# EAGLE board tp001 (EAGLE 7.6.0)

Size 56.82 x 53.33 mm. Coordinates in mm from the lower left corner, seen from the top.
Outline: 0,0 56.82,0 56.82,53.33 0,53.33 0,0
Copper layers (1*16): Top 0.035mm / dielectric 1.5mm / Bottom 0.035mm
Design rules "default": minimum track width 10mil, minimum drill 24mil, track to track 8mil, track to pad 8mil, pad to pad 8mil, via to via 8mil, smd to smd 8mil, copper to edge 40mil, drill to drill 8mil, minimum pad ring 10mil, minimum via ring 8mil, stop-mask expansion 4mil, vias tented up to drill 0mil, thermal gap 10mil

## Footprints (pad centres in the part's own frame; a part is rotated, then mirrored left to right if it is on the bottom)
LED5MM = drill 0.813 octagon: A -1.27,0; K 1.27,0
2P-2.54-65/35MIL = drill 0.889 pad 1.651 square: 1 0,1.27 | drill 0.889 pad 1.651: 2 0,-1.27
0207/10 = drill 0.813 octagon: 1 -5.08,0; 2 5.08,0
DIP04YL = drill 0.813 long: 1 -3.81,-3.81; 2 -1.27,-3.81; 3 1.27,-3.81; 4 3.81,-3.81; 5 3.81,3.81; 6 1.27,3.81; 7 -1.27,3.81; 8 -3.81,3.81
DIL14 = drill 0.813 long: 1 -7.62,-3.81; 2 -5.08,-3.81; 3 -2.54,-3.81; 4 0,-3.81; 5 2.54,-3.81; 6 5.08,-3.81; 7 7.62,-3.81; 8 7.62,3.81; 9 5.08,3.81; 10 2.54,3.81; 11 0,3.81; 12 -2.54,3.81; 13 -5.08,3.81; 14 -7.62,3.81

## Placement (x,y rotation side)
D1  [LED5MM]  5,48.18 0 top
D2  [LED5MM]  5,137.08 0 top  (outside the outline)
D3  [LED5MM]  5,238.68 0 top  (outside the outline)
D4  [LED5MM]  5,302.18 0 top  (outside the outline)
D5  [LED5MM]  5,314.88 0 top  (outside the outline)
D6  [LED5MM]  5,327.58 0 top  (outside the outline)
D7  [LED5MM]  5,340.28 0 top  (outside the outline)
D8  [LED5MM]  5,352.98 0 top  (outside the outline)
D9  [LED5MM]  5,365.68 0 top  (outside the outline)
D10  [LED5MM]  5,378.38 0 top  (outside the outline)
D11  [LED5MM]  5,391.08 0 top  (outside the outline)
D12  [LED5MM]  5,403.78 0 top  (outside the outline)
D13  [LED5MM]  5,416.48 0 top  (outside the outline)
D14  [LED5MM]  5,429.18 0 top  (outside the outline)
D15  [LED5MM]  5,441.88 0 top  (outside the outline)
D16  [LED5MM]  5,454.58 0 top  (outside the outline)
D17  [LED5MM]  5,467.28 0 top  (outside the outline)
D18  [LED5MM]  5,479.98 0 top  (outside the outline)
D19  [LED5MM]  5,492.68 0 top  (outside the outline)
D20  [LED5MM]  5,505.38 0 top  (outside the outline)
D21  [LED5MM]  5,518.08 0 top  (outside the outline)
D22  [LED5MM]  5,530.78 0 top  (outside the outline)
D23  [LED5MM]  5,543.48 0 top  (outside the outline)
D24  [LED5MM]  5,556.18 0 top  (outside the outline)
D25  [LED5MM]  5,568.88 0 top  (outside the outline)
D26  [LED5MM]  5,581.58 0 top  (outside the outline)
D27  [LED5MM]  5,594.28 0 top  (outside the outline)
D28  [LED5MM]  5,606.98 0 top  (outside the outline)
D29  [LED5MM]  5,619.68 0 top  (outside the outline)
D30  [LED5MM]  5,632.38 0 top  (outside the outline)
D31  [LED5MM]  5,645.08 0 top  (outside the outline)
D32  [LED5MM]  5,657.78 0 top  (outside the outline)
D33  [LED5MM]  5,670.48 0 top  (outside the outline)
D34  [LED5MM]  5,683.18 0 top  (outside the outline)
D35  [LED5MM]  5,695.88 0 top  (outside the outline)
D36  [LED5MM]  5,708.58 0 top  (outside the outline)
D37  [LED5MM]  5,721.28 0 top  (outside the outline)
D38  [LED5MM]  5,733.98 0 top  (outside the outline)
D39  [LED5MM]  5,746.68 0 top  (outside the outline)
D40  [LED5MM]  5,759.38 0 top  (outside the outline)
D41  [LED5MM]  5,772.08 0 top  (outside the outline)
D42  [LED5MM]  5,784.78 0 top  (outside the outline)
D43  [LED5MM]  5,797.48 0 top  (outside the outline)
D44  [LED5MM]  5,810.18 0 top  (outside the outline)
D45  [LED5MM]  5,822.88 0 top  (outside the outline)
D46  [LED5MM]  5,835.58 0 top  (outside the outline)
D47  [LED5MM]  5,848.28 0 top  (outside the outline)
D48  [LED5MM]  5,860.98 0 top  (outside the outline)
D49  [LED5MM]  5,873.68 0 top  (outside the outline)
D50  [LED5MM]  5,886.38 0 top  (outside the outline)
D51  [LED5MM]  5,899.08 0 top  (outside the outline)
D52  [LED5MM]  5,911.78 0 top  (outside the outline)
D53  [LED5MM]  5,924.48 0 top  (outside the outline)
D54  [LED5MM]  5,937.18 0 top  (outside the outline)
D55  [LED5MM]  5,949.88 0 top  (outside the outline)
D56  [LED5MM]  5,962.58 0 top  (outside the outline)
D57  [LED5MM]  5,975.28 0 top  (outside the outline)
D58  [LED5MM]  5,987.98 0 top  (outside the outline)
P1  5V  [2P-2.54-65/35MIL]  5,10.08 0 top
R1  100‎Ω  [0207/10]  5,60.88 0 top  (outside the outline)
R2  200‎Ω  [0207/10]  5,149.78 0 top  (outside the outline)
R3  200‎Ω  [0207/10]  5,225.98 0 top  (outside the outline)
SW1  [DIP04YL]  5,22.78 0 top
U1  [DIL14]  5,251.38 0 top  (outside the outline)
U2  [DIL14]  5,264.08 0 top  (outside the outline)
U3  [DIL14]  5,276.78 0 top  (outside the outline)
U4  [DIL14]  5,289.48 0 top  (outside the outline)
U5  [DIL14]  5,35.48 0 top
U6  [DIL14]  5,73.58 0 top  (outside the outline)
U7  [DIL14]  5,86.28 0 top  (outside the outline)
U8  [DIL14]  5,98.98 0 top  (outside the outline)
U9  [DIL14]  5,111.68 0 top  (outside the outline)
U10  [DIL14]  5,124.38 0 top  (outside the outline)
U11  [DIL14]  5,162.48 0 top  (outside the outline)
U12  [DIL14]  5,175.18 0 top  (outside the outline)
U13  [DIL14]  5,187.88 0 top  (outside the outline)
U14  [DIL14]  5,200.58 0 top  (outside the outline)
U15  [DIL14]  5,213.28 0 top  (outside the outline)

## Library data of the parts
D1-D58 P1 R1-R3 SW1 U1-U15 = AUTODESK_CIRCUITS_BREADBOARD

## Nets
N$1: P1.2 SW1.1 SW1.2 U1.1 U1.10 U1.14 U2.1 U2.10 U2.14 U3.1 U3.13 U3.14 U4.4 U4.10 U4.14 U5.1 U5.10 U5.14 U6.1 U6.10 U6.14 U7.4 U7.13 U7.14 U8.1 U8.13 U8.14 U9.1 U9.10 U9.14 U10.4 U10.10 U10.14 U11.1 U11.10 U11.14 U12.4 U12.13 U12.14 U13.1 U13.10 U13.14 U14.4 U14.13 U14.14 U15.4 U15.10 U15.14
N$2: SW1.8 U1.3 U1.11 U2.3 U2.11 U3.3 U3.11 U4.3 U4.11 U5.3 U5.11 U6.3 U6.11 U7.3 U7.11 U8.3 U8.11 U9.3 U9.11 U10.3 U10.11 U11.3 U11.11 U12.3 U12.11 U13.3 U13.11 U14.3 U14.11 U15.3 U15.11
N$3: SW1.7 U1.4 U1.13 U2.4 U2.13 U3.4 U3.10 U4.1 U4.13 U5.4 U5.13 U6.4 U6.13 U7.1 U7.10 U8.4 U8.10 U9.4 U9.13 U10.1 U10.13 U11.4 U11.13 U12.1 U12.10 U13.4 U13.13 U14.1 U14.10 U15.1 U15.13
N$4: D1.K D2.K D3.K D4.K D5.K D6.K D7.K D8.K D9.K D10.K D11.K D12.K D13.K D14.K D15.K D16.K D17.K D18.K D19.K D20.K D21.K D22.K D23.K D24.K D25.K D26.K D27.K D28.K D29.K D30.K D31.K D32.K D33.K D34.K D35.K D36.K D37.K D38.K D39.K D40.K D41.K D42.K D43.K D44.K D45.K D46.K D47.K D48.K D49.K D50.K D51.K D52.K D53.K D54.K D55.K D56.K D57.K D58.K P1.1 U1.7 U2.7 U3.7 U4.7 U5.7 U6.7 U7.7 U8.7 U9.7 U10.7 U11.7 U12.7 U13.7 U14.7 U15.7
N$5: U5.5 U5.12
N$6: R1.1 U1.12 U5.9
N$7: U6.2 U6.9
N$8: U6.5 U7.2
N$9: U7.5 U8.2
N$10: U8.5 U9.2
N$11: U9.5 U10.2
N$12: U6.12 U7.9
N$13: U7.12 U8.9
N$14: U8.12 U9.9
N$15: R2.1 U9.12 U10.9
N$16: U10.5 U10.12
N$17: D2.A D30.A D31.A R2.2
N$18: U11.5 U12.2
N$19: U12.5 U13.2
N$20: U13.5 U14.2
N$21: U14.5 U15.2
N$22: U11.12 U12.9
N$23: U12.12 U13.9
N$24: U13.12 U14.9
N$25: R3.1 U14.12 U15.9
N$26: U11.2 U11.9
N$27: U15.5 U15.12
N$28: D3.A D32.A D33.A D34.A D35.A D36.A D37.A D38.A D39.A D40.A D41.A D42.A D43.A D44.A D45.A D46.A D47.A D48.A D49.A D50.A D51.A D52.A D53.A D54.A D55.A D56.A D57.A D58.A R3.2
N$29: U3.9 U4.12
N$30: U1.9 U2.12
N$31: U4.2 U4.9
N$32: U1.5 U5.2
N$33: U1.2 U2.5
N$34: U2.2 U3.5
N$35: U3.2 U4.5
N$36: D1.A D4.A D5.A D6.A D7.A D8.A D9.A D10.A D11.A D12.A D13.A D14.A D15.A D16.A D17.A D18.A D19.A D20.A D21.A D22.A D23.A D24.A D25.A D26.A D27.A D28.A D29.A R1.2

## Tracks (layer width: path | path; a pad name or v marks a point on that pad's centre or on a via)
N$1  (47 unrouted)
N$2  (30 unrouted)
N$3  (30 unrouted)
N$4  (73 unrouted)
N$5  (1 unrouted)
N$6  (2 unrouted)
N$7  (1 unrouted)
N$8  (1 unrouted)
N$9  (1 unrouted)
N$10  (1 unrouted)
N$11  (1 unrouted)
N$12  (1 unrouted)
N$13  (1 unrouted)
N$14  (1 unrouted)
N$15  (2 unrouted)
N$16  (1 unrouted)
N$17  (3 unrouted)
N$18  (1 unrouted)
N$19  (1 unrouted)
N$20  (1 unrouted)
N$21  (1 unrouted)
N$22  (1 unrouted)
N$23  (1 unrouted)
N$24  (1 unrouted)
N$25  (2 unrouted)
N$26  (1 unrouted)
N$27  (1 unrouted)
N$28  (28 unrouted)
N$29  (1 unrouted)
N$30  (1 unrouted)
N$31  (1 unrouted)
N$32  (1 unrouted)
N$33  (1 unrouted)
N$34  (1 unrouted)
N$35  (1 unrouted)
N$36  (27 unrouted)